# EAGLE board Symposion_K3_Arduino-Peripherie-IF (EAGLE 9.6.2)
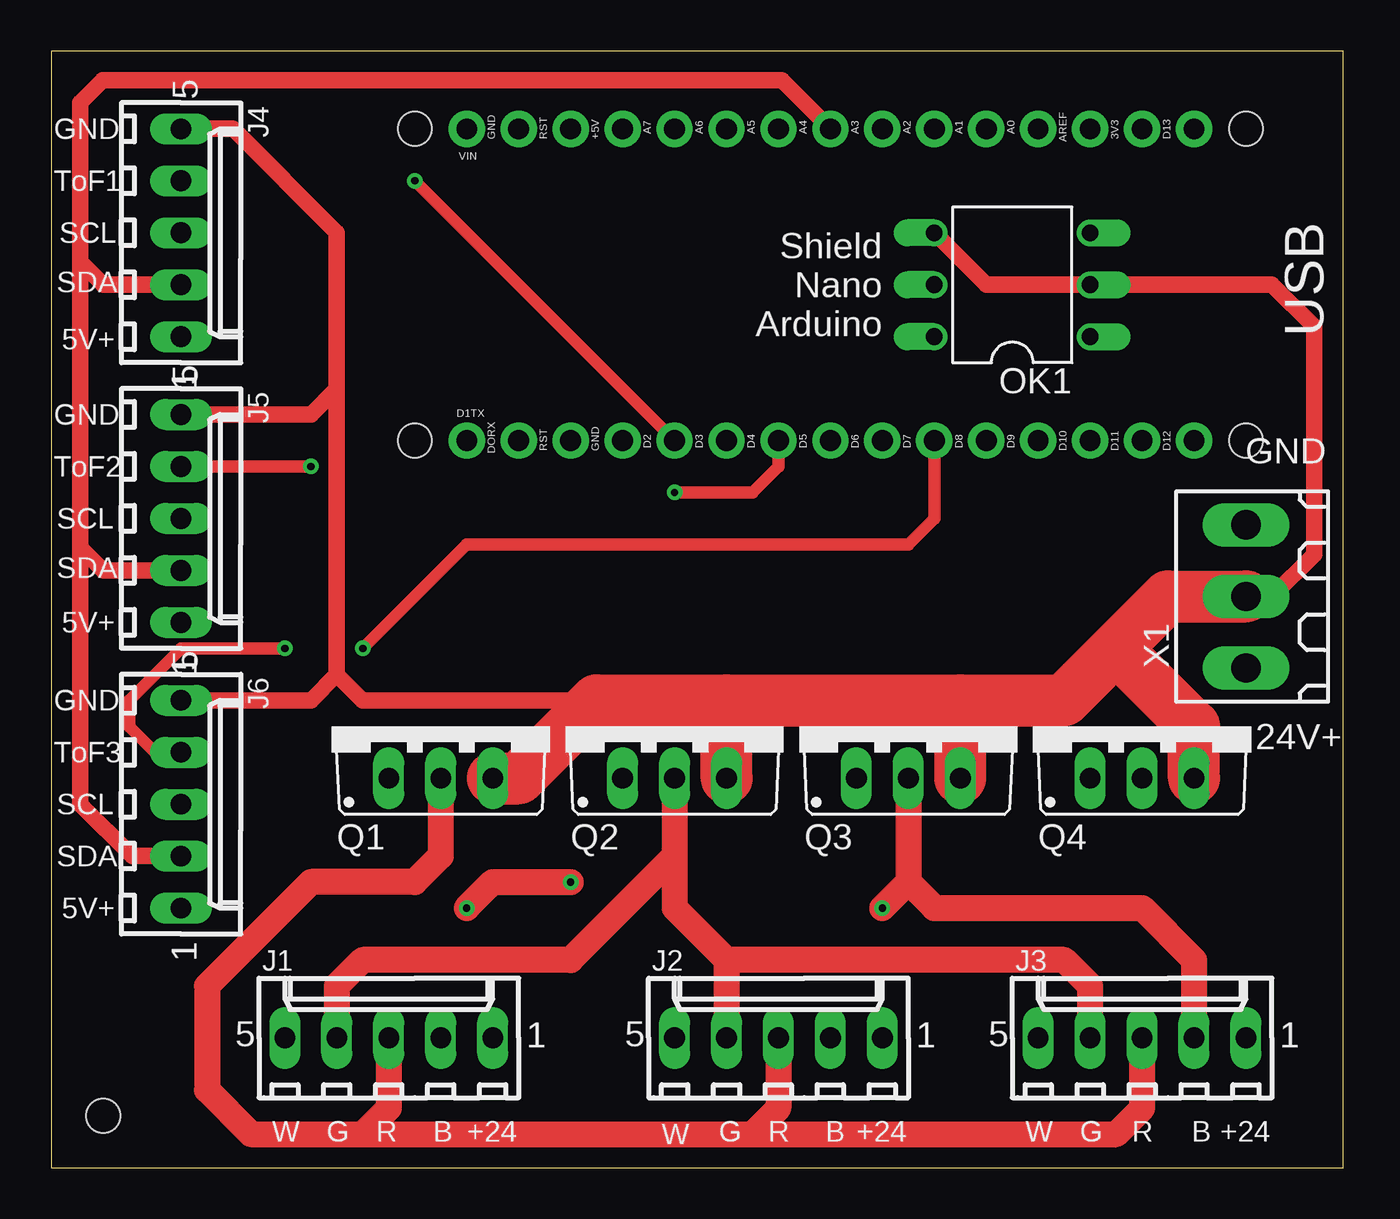
[diagram p0: board, top side]
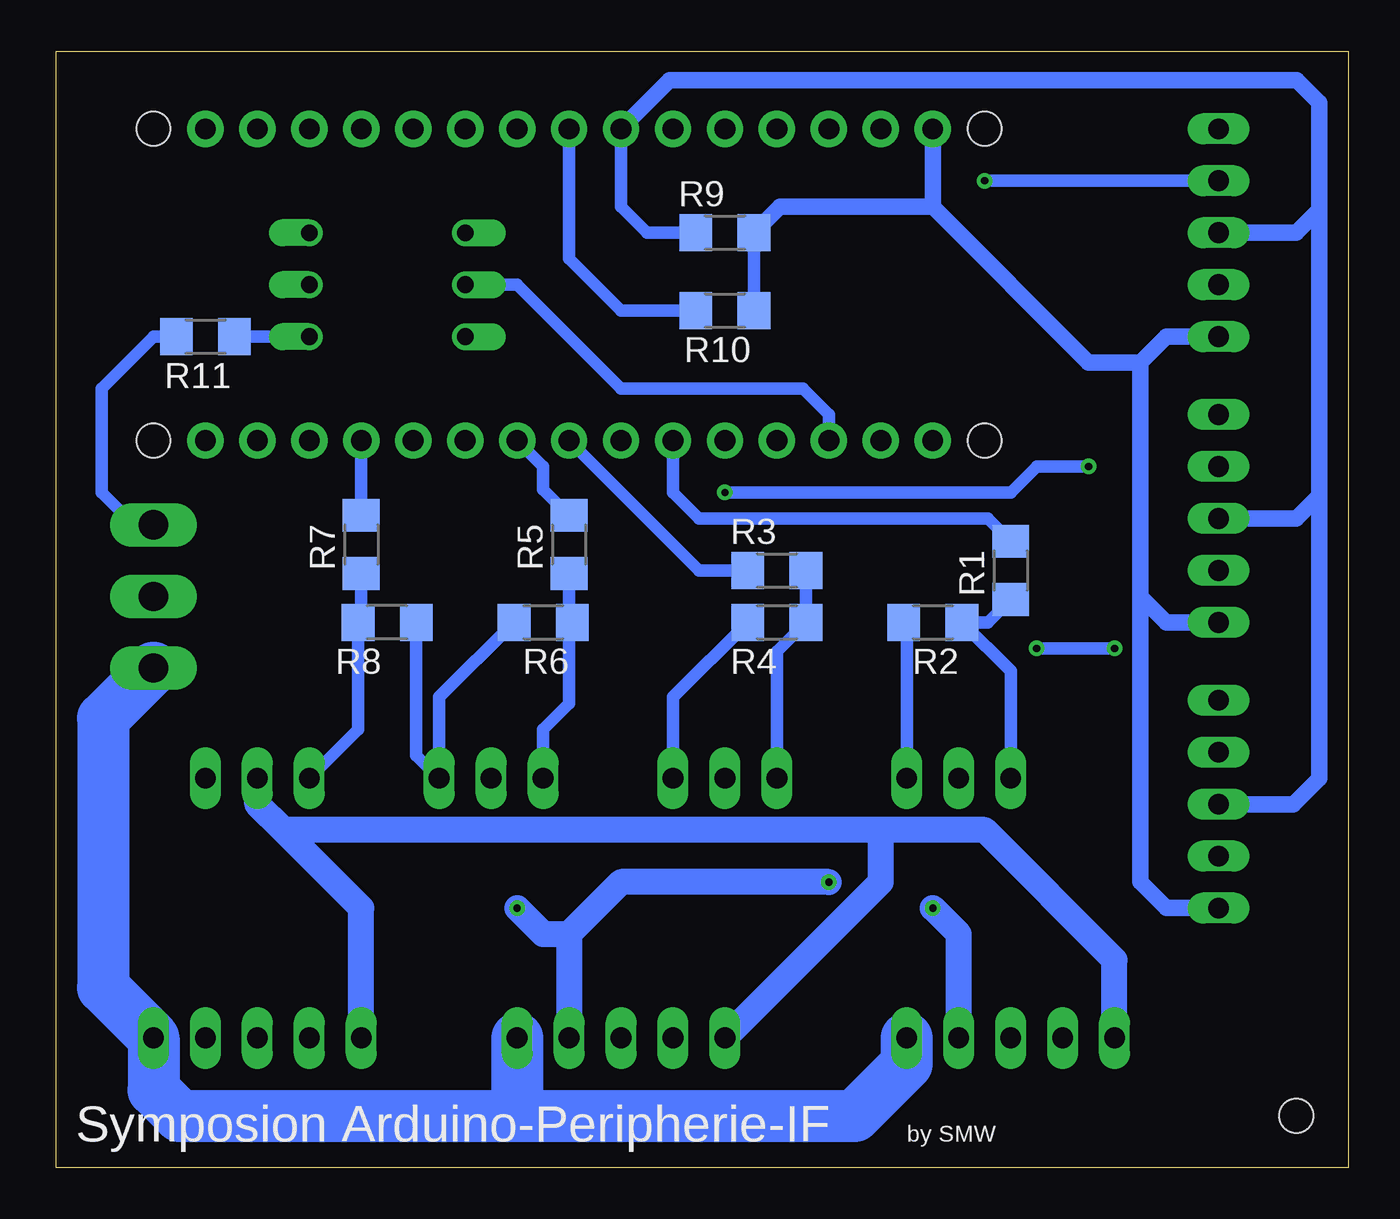
[diagram p1: board, bottom side, seen from below]

Size 63.17 x 54.6 mm. Coordinates in mm from the lower left corner, seen from the top.
Outline: 0,0 63.17,0 63.17,54.6 0,54.6 0,0
Copper layers (1*16): Top 0.035mm / dielectric 1.5mm / Bottom 0.035mm
Design rules "default": minimum track width 6mil, minimum drill 0.35mm, track to track 6mil, track to pad 6mil, pad to pad 6mil, via to via 6mil, smd to smd 6mil, copper to edge 40mil, drill to drill 6mil, minimum pad ring 10mil, minimum via ring 8mil, stop-mask expansion 4mil, vias tented up to drill 0mil, thermal gap 10mil
Holes 1.65 mm at 2.54,2.54

## Footprints (pad centres in the part's own frame; a part is rotated, then mirrored left to right if it is on the bottom)
6410-05 = drill 1.016 long: 1 5.08,0; 2 2.54,0; 3 0,0; 4 -2.54,0; 5 -5.08,0
DIL06 = drill 0.813 offset: 1 -2.54,-3.81; 2 0,-3.81; 3 2.54,-3.81; 4 2.54,3.81; 5 0,3.81; 6 -2.54,3.81
0_WSH_FAVORITES_ARDUINO_NANO = drill 1.016 pad 1.778: 3V3 6.35,1.27; 5V 31.75,1.27; A0 11.43,1.27; A1 13.97,1.27; A2 16.51,1.27; A3 19.05,1.27; A4 21.59,1.27; A5 24.13,1.27; A6 26.67,1.27; A7 29.21,1.27; D2 29.21,16.51; D3 26.67,16.51; D4 24.13,16.51; D5 21.59,16.51; D6 19.05,16.51; D7 16.51,16.51; D8 13.97,16.51; D9 11.43,16.51; D10 8.89,16.51; D11 6.35,16.51; D12 3.81,16.51; D13 3.81,1.27; GND 31.75,16.51; GND. 36.83,1.27; REF 8.89,1.27; RST 34.29,16.51; RST. 34.29,1.27; RX1 36.83,16.51; TX1 39.37,16.51; VIN 39.37,1.27 | hole 1.651: 1.27,1.27; 1.27,16.51; 41.91,16.51; 41.91,1.27
0_WSH_FAVORITES_TO220BV = drill 1.016 long: D 0,-2.54; G -2.54,-2.54; S 2.54,-2.54
R1206 = smd 1.6 x 1.803: 1 -1.422,0; 2 1.422,0
180-3 = drill 1.422 long: 1 -3.5,0; 2 0,0; 3 3.5,0

## Placement (x,y rotation side)
J1  22-27-2051-05  [6410-05]  16.51,6.35 0 top
J2  22-27-2051-05  [6410-05]  35.56,6.35 0 top
J3  22-27-2051-05  [6410-05]  53.34,6.35 0 top
J4  22-27-2051-05  [6410-05]  6.35,45.72 270 top
J5  22-27-2051-05  [6410-05]  6.35,31.75 270 top
J6  22-27-2051-05  [6410-05]  6.35,17.78 270 top
OK1  CNY17F  [DIL06]  46.99,43.18 90 top
PCB1  0_WSH_FAVORITES_ARDUINO_NANO  [0_WSH_FAVORITES_ARDUINO_NANO]  59.69,52.07 180 top
Q1  0_WSH_FAVORITES_BUZ11BV  [0_WSH_FAVORITES_TO220BV]  19.05,21.59 0 top
Q2  0_WSH_FAVORITES_BUZ11BV  [0_WSH_FAVORITES_TO220BV]  30.48,21.59 0 top
Q3  0_WSH_FAVORITES_BUZ11BV  [0_WSH_FAVORITES_TO220BV]  41.91,21.59 0 top
Q4  0_WSH_FAVORITES_BUZ11BV  [0_WSH_FAVORITES_TO220BV]  53.34,21.59 0 top
R1  1k2  [R1206]  16.51,29.21 90 bottom
R2  100k  [R1206]  20.32,26.67 180 bottom
R3  1k2  [R1206]  27.94,29.21 180 bottom
R4  100k  [R1206]  27.94,26.67 180 bottom
R5  1k2  [R1206]  38.1,30.48 90 bottom
R6  100k  [R1206]  39.37,26.67 180 bottom
R7  1k2  [R1206]  48.26,30.48 90 bottom
R8  100k  [R1206]  46.99,26.67 0 bottom
R9  1k8  [R1206]  30.48,45.72 180 bottom
R10  1k8  [R1206]  30.48,41.91 180 bottom
R11  1k8  [R1206]  55.88,40.64 180 bottom
X1  180-3  [180-3]  58.42,27.94 90 top

## Library data of the parts
J1-J6 = con-molex; MF: MOLEX; OC_FARNELL: unknown; OC_NEWARK: unknown
OK1 = optocoupler; MF: VISHAY/TELEFUNKEN; MPN: CNY17F-3; OC_FARNELL: 1469473; OC_NEWARK: 58K0172
PCB1 Q1-Q4 = 20221130_WSH_Eagle_Lib
R1-R11 = resistor
X1 = con-weidmueller-sl35; OC_FARNELL: unknown; OC_NEWARK: unknown

## Nets
5V+: J4.1 J5.1 J6.1 PCB1.VIN R9.1 R10.1
24V: J1.1 J2.1 J3.1 X1.1
BOUT: J1.2 J2.2 J3.2 Q3.D
BPWM: PCB1.D6 R5.2
GND: J4.5 J5.5 J6.5 OK1.2 OK1.4 Q1.S Q2.S Q3.S Q4.S R2.2 R4.2 R6.2 R8.2 X1.2
GOUT: J1.4 J2.4 J3.4 Q2.D
GPWM: PCB1.D5 R3.2
N$1: Q1.G R1.1 R2.1
N$2: OK1.1 R11.1
N$4: Q2.G R3.1 R4.1
N$7: Q3.G R5.1 R6.1
N$10: Q4.G R7.1 R8.1
ROUT: J1.3 J2.3 J3.3 Q1.D
RPWM: PCB1.D3 R1.2
RST: OK1.5 PCB1.RST
SCL: J4.3 J5.3 J6.3 PCB1.A5 R9.2
SDA: J4.2 J5.2 J6.2 PCB1.A4 R10.2
SYS: R11.2 X1.3
TOF1: J4.4 PCB1.D2
TOF2: J5.4 PCB1.D4
TOF3: J6.4 PCB1.D7
WOUT: J1.5 J2.5 J3.5 Q4.D
WPWM: PCB1.D9 R7.2

## Tracks (layer width: path | path; a pad name or v marks a point on that pad's centre or on a via)
5V+
  Bottom 0.61: R9.1 R10.1
  Bottom 0.813: PCB1.VIN 20.32,46.99 | J4.1 8.89,40.64 10.16,39.37 | 10.16,39.37 10.16,27.94 | 10.16,27.94 10.16,13.97 8.89,12.7 J6.1 | J5.1 8.89,26.67 10.16,27.94 | 10.16,39.37 12.7,39.37 20.32,46.99 | 20.32,46.99 27.79,46.99 R9.1
24V
  Bottom 2.54: 40.64,2.54 57.15,2.54 58.42,3.81 J3.1 60.88,8.81 60.88,21.98 X1.1 | 40.64,2.54 24.13,2.54 21.59,5.08 J1.1 | J2.1 40.64,2.54
BOUT  (via drill 0.35)
  Top 1.27: Q3.D 41.91,13.97 | J3.2 55.88,10.16 53.34,12.7 43.18,12.7 41.91,13.97 | v20.32,12.7 21.59,13.97 v25.4,13.97 | 41.91,13.97 v40.64,12.7
  Bottom 1.27: J1.2 19.05,11.43 v20.32,12.7 | v25.4,13.97 35.56,13.97 38.1,11.43 | 38.1,11.43 J2.2 | v40.64,12.7 39.37,11.43 38.1,11.43
BPWM
  Bottom 0.61: R5.2 39.37,33.17 39.37,34.29 PCB1.D6
GND
  Top 0.813: 13.97,38.1 13.97,45.72 8.89,50.8 J4.5 | J5.5 12.7,36.83 13.97,38.1 | J6.5 12.7,22.86 13.97,24.13 | 13.97,38.1 13.97,24.13 | 13.97,24.13 15.24,22.86 26.67,22.86 | X1.2 59.69,27.94 61.75,30 61.75,41.12 59.69,43.18 OK1.2 45.72,43.18 OK1.4
  Top 2.54: 33.02,22.86 26.67,22.86 22.86,19.05 Q1.S | 33.02,22.86 44.45,22.86 | 44.45,22.86 49.53,22.86 52.07,25.4 | Q3.S 44.45,22.86 | Q2.S 33.02,22.86 | Q4.S 55.88,21.59 52.07,25.4 | 52.07,25.4 54.61,27.94 X1.2
  Bottom 0.61: R2.2 21.59,26.52 Q1.S | R4.2 33.02,23.01 Q2.S | R6.2 44.45,23.01 Q3.S 45.57,20.17 R8.2
GOUT
  Top 1.27: J1.4 13.97,8.89 15.24,10.16 25.4,10.16 30.48,15.24 Q2.D 30.48,12.7 33.02,10.16 | 33.02,10.16 J2.4 | J3.4 50.8,8.89 49.53,10.16 33.02,10.16
GPWM
  Bottom 0.61: PCB1.D5 31.75,29.21 R3.2
N$1
  Bottom 0.61: R1.1 17.63,26.67 R2.1 16.51,24.28 Q1.G
N$2
  Bottom 0.61: R11.1 OK1.1
N$4
  Bottom 0.61: Q2.G 27.94,25.25 R4.1 R3.1
N$7
  Bottom 0.61: R6.1 38.1,26.52 | Q3.G 39.37,21.44 38.1,22.71 38.1,26.52 | R5.1 38.1,26.52
N$10
  Bottom 0.61: Q4.G 48.41,21.44 R8.1 48.26,26.82 R7.1
ROUT
  Top 1.27: Q1.D 19.05,15.24 17.78,13.97 12.7,13.97 7.62,8.89 7.62,3.81 9.78,1.65 15.24,1.65 | J3.3 53.34,2.92 52.07,1.65 34.29,1.65 | 15.24,1.65 34.29,1.65 | J1.3 16.51,2.92 15.24,1.65 | J2.3 35.56,2.92 34.29,1.65
RPWM
  Bottom 0.61: R1.2 17.63,31.75 31.75,31.75 33.02,33.02 PCB1.D3
RST
  Bottom 0.61: PCB1.RST 25.4,36.83 26.67,38.1 35.56,38.1 40.64,43.18 OK1.5
SCL
  Bottom 0.61: R9.2 34.29,45.72 35.56,46.99 PCB1.A5
  Bottom 0.813: PCB1.A5 33.18,53.18 2.53,53.18 1.42,52.07 1.42,46.84 | 1.42,46.84 1.42,32.87 | 1.42,32.87 1.42,19.05 2.69,17.78 J6.3 | J4.3 2.54,45.72 1.42,46.84 | 1.42,32.87 2.54,31.75 J5.3
SDA
  Top 0.813: PCB1.A4 35.72,53.18 2.53,53.18 1.42,52.07 1.42,44.3 | 1.42,44.3 1.42,30.33 | 1.42,30.33 1.42,17.78 3.96,15.24 J6.2 | J5.2 2.54,29.21 1.42,30.33 | J4.2 2.54,43.18 1.42,44.3
  Bottom 0.61: R10.2 35.56,41.91 38.1,44.45 PCB1.A4
SYS
  Bottom 0.61: X1.3 58.73,31.75 59.69,31.75 60.96,33.02 60.96,38.1 58.42,40.64 R11.2
TOF1  (via drill 0.35)
  Top 0.61: PCB1.D2 v17.78,48.26
  Bottom 0.61: J4.4 v17.78,48.26
TOF2  (via drill 0.35)
  Top 0.61: J5.4 v12.7,34.29 | v30.48,33.02 34.29,33.02 35.56,34.29 PCB1.D4
  Bottom 0.61: v12.7,34.29 15.24,34.29 16.51,33.02 v30.48,33.02
TOF3  (via drill 0.35)
  Top 0.61: J6.4 5.08,20.32 3.81,21.59 3.81,22.86 6.35,25.4 v11.43,25.4 | v15.24,25.4 20.32,30.48 41.91,30.48 43.18,31.75 PCB1.D7
  Bottom 0.61: v15.24,25.4 v11.43,25.4
WOUT
  Bottom 1.27: J1.5 11.43,10.16 17.78,16.51 22.86,16.51 | J2.5 22.86,13.97 22.86,16.51 | Q4.D 53.34,17.78 52.07,16.51 | 22.86,16.51 52.07,16.51 | J3.5 48.26,12.7 52.07,16.51
WPWM
  Bottom 0.61: R7.2 PCB1.D9

## Text on the board
tNames: GND | ToF1 | SCL | SDA | USB | 5V+ | GND | GND | ToF2 | SCL | SDA | 5V+ | GND | 24V+ | ToF3 | SCL | SDA | 5V+ | W | G | R | B | +24 | W | G | R | B | +24 | W | G | R | B | +24
bNames: by SMW | Symposion Arduino-Peripherie-IF